# EAGLE board I2C_Traslator_v10 (EAGLE 5.06)
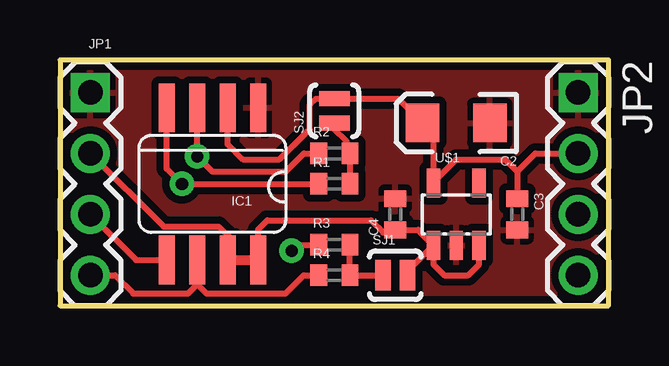
[diagram p0: board, top side]
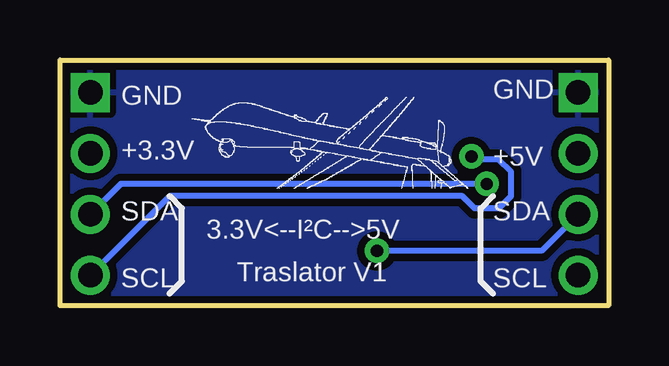
[diagram p1: board, bottom side, seen from below]

Size 22.86 x 10.25 mm. Coordinates in mm from the lower left corner, seen from the top.
Outline: 0,0 22.86,0 22.86,10.25 0,10.25 0,0
Copper layers (1*16): Top 0.035mm / dielectric 1.5mm / Bottom 0.035mm
Design rules "SparkFun": minimum track width 8mil, minimum drill 20mil, track to track 8mil, track to pad 8mil, pad to pad 8mil, via to via 8mil, smd to smd 8mil, copper to edge 10mil, drill to drill 8mil, minimum pad ring 12mil, minimum via ring 10mil, stop-mask expansion 4mil, vias tented up to drill 25mil, thermal gap 10mil

## Footprints (pad centres in the part's own frame; a part is rotated, then mirrored left to right if it is on the bottom)
EIA3216 = smd 1.4 x 1.6: A 1.4,0; C -1.4,0
C0402 = smd 0.7 x 0.9: 1 -0.65,0; 2 0.65,0
SOIC8 = smd 0.66 x 2.032: 1 -1.905,-3.175; 2 -0.635,-3.175; 3 0.635,-3.175; 4 1.905,-3.175; 5 1.905,3.175; 6 0.635,3.175; 7 -0.635,3.175; 8 -1.905,3.175
1X04 = drill 1.016 square: 1 0,0 | drill 1.016 round: 2 2.54,0; 3 5.08,0; 4 7.62,0
SJ_2S-NOTRACE = smd 0.635 x 1.27: 1 -0.508,0; 2 0.508,0
SOT23-5 = smd 0.55 x 1.2: 1 -0.95,-1.3; 2 0,-1.3; 3 0.95,-1.3; 4 0.95,1.3; 5 -0.95,1.3

## Placement (x,y rotation side)
C2  10uF  [EIA3216]  16.51,7.62 180 top
C3  .1uF  [C0402]  19.05,3.81 270 top
C4  .1uF  [C0402]  13.97,3.81 90 top
IC1  [SOIC8]  6.35,5.08 180 top
JP1  [1X04]  1.27,8.89 270 top
JP2  [1X04]  21.59,8.89 270 top
R1  10k  [C0402]  11.43,5.08 0 top
R2  10k  [C0402]  11.43,6.35 0 top
R3  10k  [C0402]  11.43,2.54 0 top
R4  10k  [C0402]  11.43,1.27 0 top
SJ1  SD2  [SJ_2S-NOTRACE]  13.97,1.27 0 top
SJ2  SD3  [SJ_2S-NOTRACE]  11.43,8.13 90 top
U$1  3.3V  [SOT23-5]  16.51,3.81 0 top
U$6  [UAV_LOGO_SMED]  11.18,6.6 0 bottom

## Library data of the parts
C2-C4 JP1 JP2 R1-R4 SJ1 SJ2 U$1 = DIYdrones3
IC1 U$6 = DIYdrones

## Nets
3.3V: C2.A C3.1 IC1.2 JP2.2 SJ2.2 U$1.5
+5V: C4.1 IC1.7 IC1.8 JP1.2 SJ1.2 U$1.1 U$1.3
GND: C2.C C3.2 C4.2 IC1.1 JP1.1 JP2.1 U$1.2
N$1: R1.2 R2.2 SJ2.1
N$2: R3.2 R4.2 SJ1.1
SCL1: IC1.3 JP2.4 R2.1
SCL2: IC1.6 JP1.4 R4.1
SDA1: IC1.4 JP2.3 R1.1
SDA2: IC1.5 JP1.3 R3.1

## Tracks (layer width: path | path; a pad name or v marks a point on that pad's centre or on a via)
3.3V
  Top 0.254: 6.99,8.88 IC1.2 6.99,6.73 7.62,6.1 9.14,6.1 10.41,7.37 10.41,8.38 10.67,8.64 SJ2.2 14.09,8.64 C2.A 15.56,7.17 U$1.5 15.56,5.15 16.51,6.1 18.54,6.1 19.05,5.59 | 19.05,5.59 C3.1 | JP2.2 19.81,6.35 19.05,5.59
+5V
  Top 0.254: C4.1 13.86,3.3 | SJ1.2 14.48,1.43 U$1.1 | C4.1 14.91,3.16 U$1.1 | C4.1 13.86,3.05 13.46,3.05 12.95,3.56 8.64,3.56 8.26,3.17 IC1.8 | JP1.2 4.32,3.3 6.6,3.3 7.11,2.79 7.11,2.03 IC1.7 | U$1.1 15.56,1.71 16,1.27 17.02,1.27 17.46,1.71 U$1.3
  Top 0.406: IC1.7 IC1.8
GND
  pour Top (isolate 0.305): 0.25,10.41 23.37,10.41 23.11,0 0,0
  pour Bottom (isolate 0.305): 0,10.41 23.11,10.41 23.11,0 0,0
N$1
  Top 0.254: SJ2.1 11.43,7.37 11.94,6.86 11.94,6.49 R2.2 R1.2
N$2
  Top 0.254: SJ1.1 R4.2 R3.2
SCL1  (via drill 0.51)
  Top 0.254: 5.71,8.9 IC1.3 v5.71,6.22 6.35,5.59 9.4,5.59 10.16,6.35 R2.1
  Bottom 0.254: JP2.4 18.29,4.57 6.1,4.57 5.59,4.06 4.57,4.06 4.06,4.57 4.06,5.59 4.57,6.1 5.59,6.1 v5.71,6.22
SCL2
  Top 0.254: JP1.4 2.29,1.27 3.05,0.51 5.33,0.51 5.71,0.89 | 5.71,0.89 5.84,1.02 5.84,1.78 IC1.6 | R4.1 10.16,1.27 9.4,0.51 6.1,0.51 5.71,0.89
SDA1  (via drill 0.51)
  Top 0.254: IC1.4 4.45,5.71 v5.08,5.08 R1.1
  Bottom 0.254: JP2.3 20.32,5.08 v5.08,5.08
SDA2  (via drill 0.51)
  Top 0.254: R3.1 9.91,2.54 v9.65,2.29 | IC1.5 3.17,1.91 JP1.3
  Bottom 0.254: v9.65,2.29 2.79,2.29 JP1.3

## Text on the board
bPlace: GND | GND | +5V | +3.3V | SDA | SDA | 3.3V<--I²C-->5V | SCL | Traslator V1 | SCL